# Altium PCB 驱动板PCB1.PcbDoc
Units mil, origin at the board's own origin, x right, y up, seen from the top; angles counter-clockwise.
Board outline 3130 x 1155 mil, 2 copper layers (Top Layer, Bottom Layer); 58 components, 42 nets, 176 pads, 160 vias.
Unrouted connection lines stored in the file: 134.
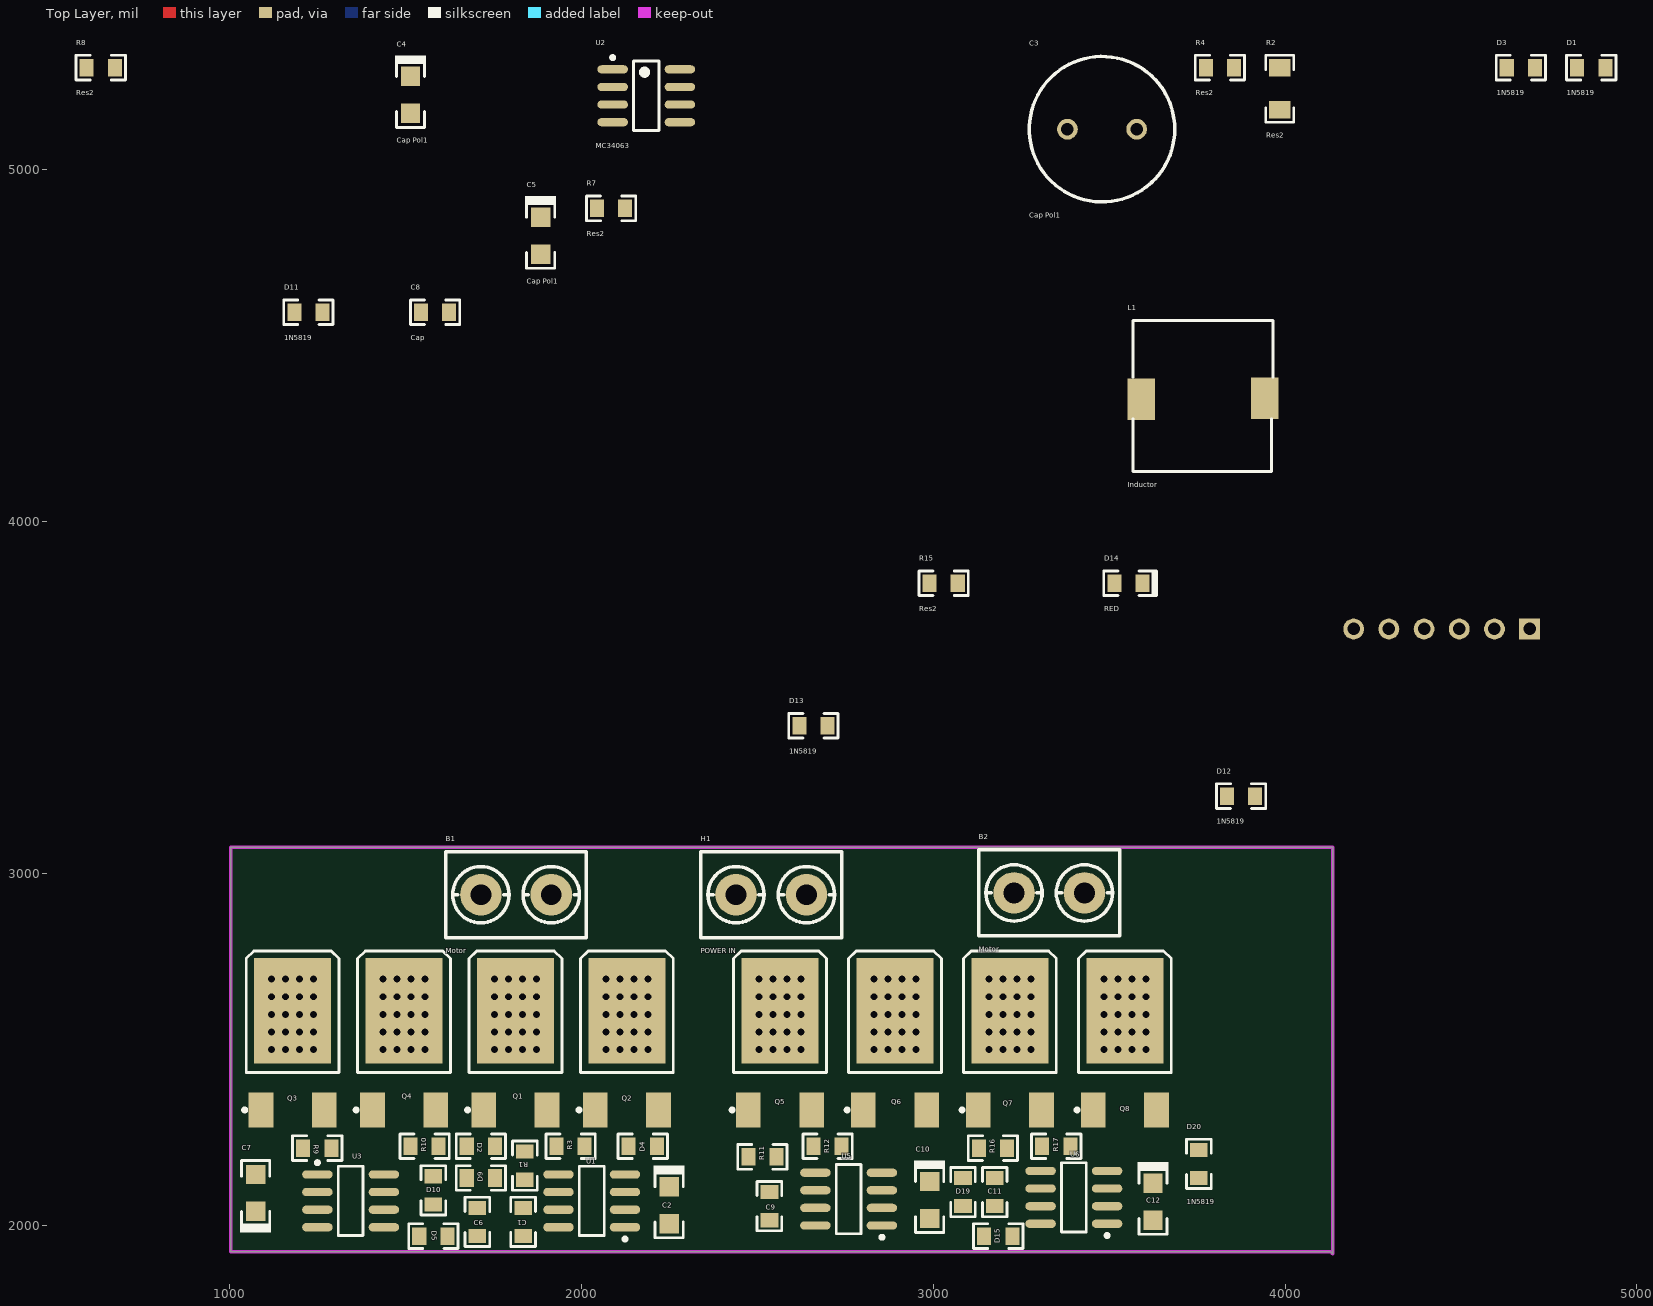
[diagram p0: Top Layer view]
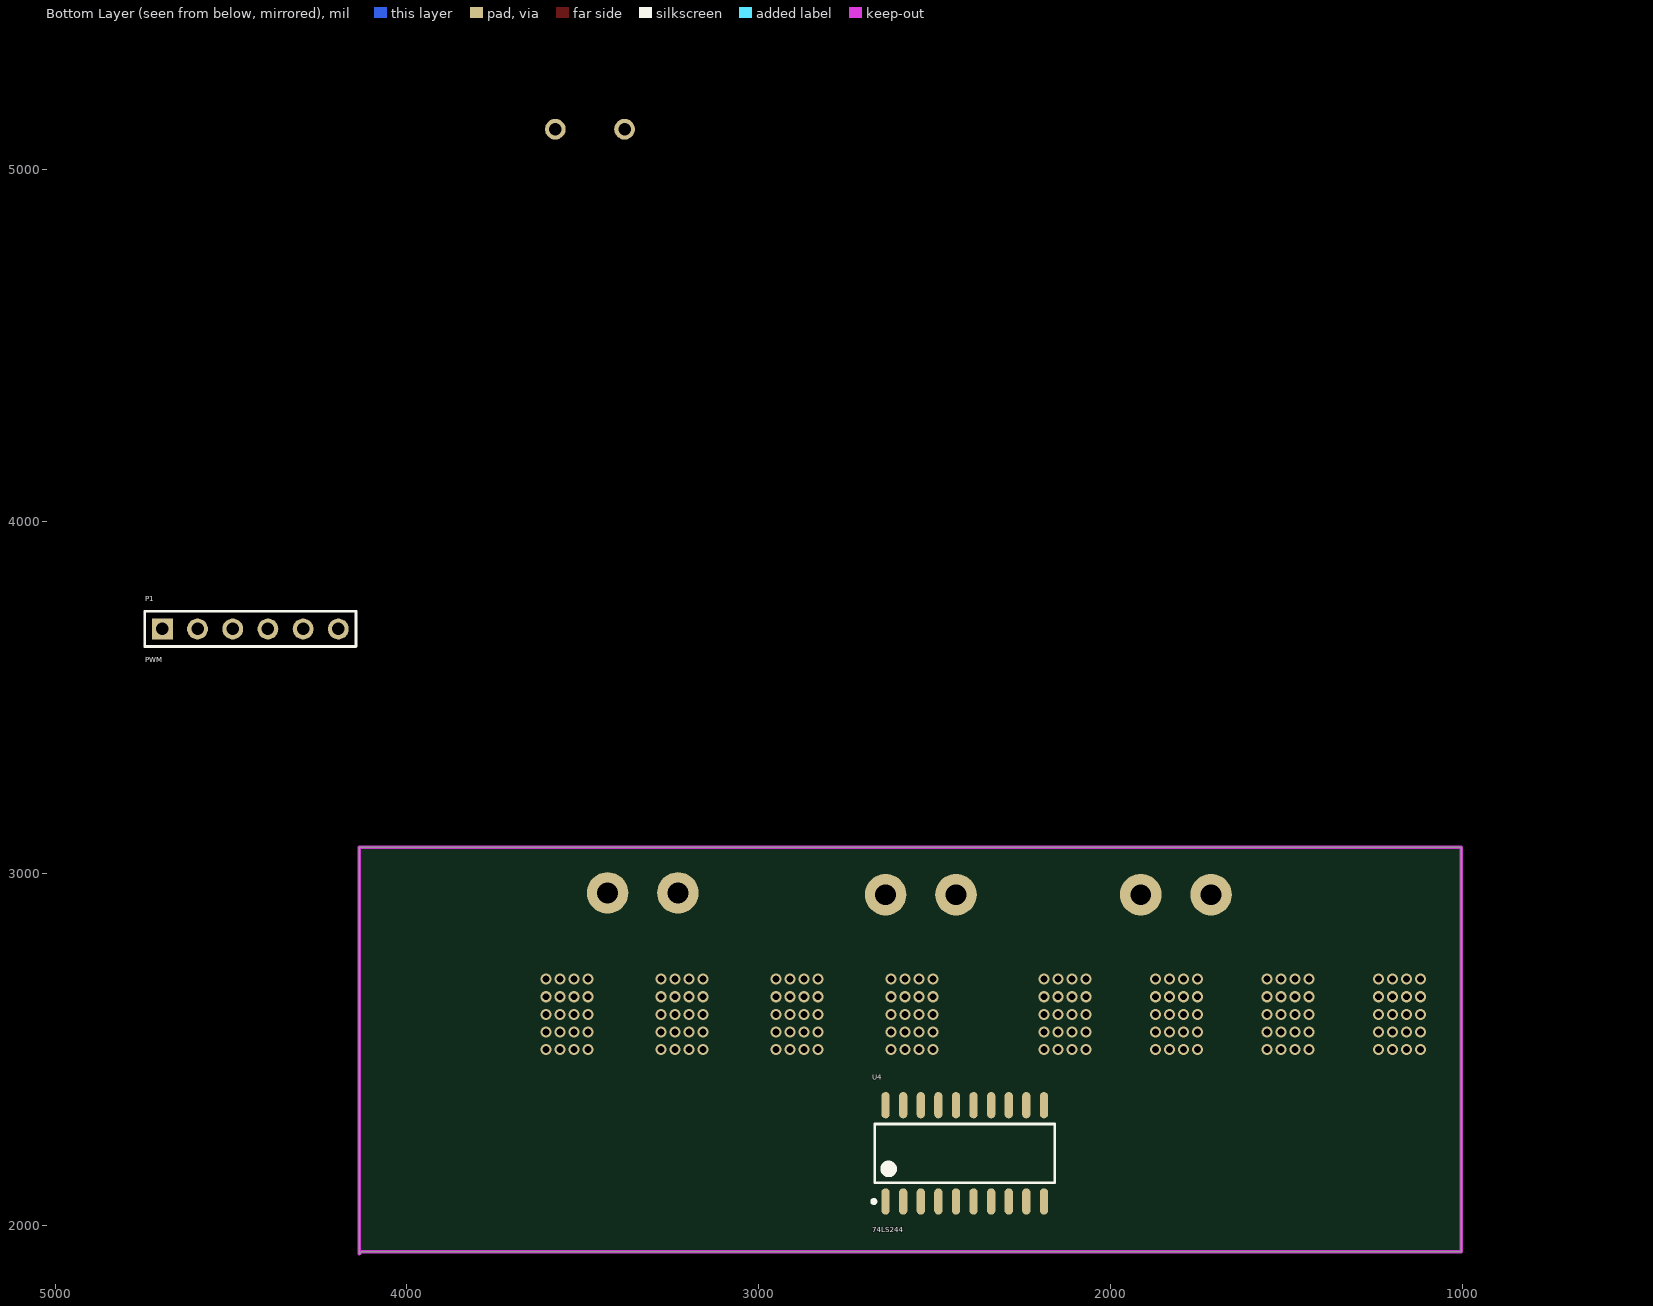
[diagram p1: Bottom Layer view, seen from below]

## Layer stack, top to bottom
Top Layer: signal copper 1.4
Dielectric: dielectric 12.6, FR-4, Dk 4.8
Bottom Layer: signal copper 1.4

## Board outline
1005,1925 4130,1925 4135,1920 4135,3075 1005,3075

## Design rules (kind name [scope] priority, off if disabled: settings)
Clearance [All] p1: gap=10
PolygonConnect [All] p1: connectstyle=Relief reliefconductorwidth=10 reliefentries=4 polygonreliefangle="90 Angle" airgapwidth=10
RoutingVias [All] p1: holewidth=28 width=50 viastyle="Through Hole" minholewidth=28 minwidth=50 maxholewidth=28 maxwidth=50
SolderMaskExpansion [All] p1: expansion=4
Width [All] p1: maxlimit=10 minlimit=10 preferedwidth=10
28 further rules are at their usual default settings.

## Components (designator, comment, footprint, x,y, rotation, side; value= is the part's Value field where it differs from the comment)
B1 "Motor" KF301-2P 1815,2940 r90 top
B2 "Motor" KF301-2P 3330,2945 r90 top
C1 "Cap" 0805(2012) 1835,2010 r90 top
C2 "Cap Pol1" SOD-323(0805) 2250,2060 r90 top
C3 "Cap Pol1" RB5-10.5 3480,5115 r0 top
C4 "Cap Pol1" SOD-323(0805) 1515,5215 r90 top
C5 "Cap Pol1" SOD-323(0805) 1885,4815 r90 top
C6 "Cap" 0805(2012) 1705,2010 r90 top
C7 "Cap Pol1" SOD-323(0805) 1075,2090 r270 top
C8 "Cap" 0805(2012) 1585,4595 r0 top
C9 "Cap" 0805(2012) 2535,2055 r90 top
C10 "Cap Pol1" SOD-323(0805) 2990,2075 r90 top
C11 "Cap" 0805(2012) 3175,2095 r90 top
C12 "Cap Pol1" SOD-323(0805) 3625,2070 r90 top
D1 "1N5819" 0805(2012) 4870,5290 r0 top
D2 "1N5819" 0805(2012) 1715,2225 r180 top
D3 "1N5819" 0805(2012) 4670,5290 r0 top
D4 "1N5819" 0805(2012) 2175,2225 r0 top
D5 "1N5819" 0805(2012) 1580,1970 r180 top
D9 "1N5819" 0805(2012) 1715,2135 r180 top
D10 "1N5819" 0805(2012) 1580,2100 r90 top
D11 "1N5819" 0805(2012) 1225,4595 r0 top
D12 "1N5819" 0805(2012) 3875,3220 r0 top
D13 "1N5819" 0805(2012) 2660,3420 r0 top
D14 "RED" 0805LED 3555,3825 r0 top
D15 "1N5819" 0805(2012) 3185,1970 r0 top
D19 "1N5819" 0805(2012) 3085,2095 r270 top
D20 "1N5819" 0805(2012) 3755,2175 r270 top
H1 "POWER IN" KF301-2P 2540,2940 r90 top
L1 "Inductor" 电感10*12 3765,4355 r0 top
P1 "PWM" HDR1X6 4695,3695 r180 bottom
Q1 "IR7843" LR7843 1813.33,2470 r270 top
Q2 "IR7843" LR7843 2130,2470 r270 top
Q3 "IR7843" LR7843 1180,2470 r270 top
Q4 "IR7843" LR7843 1496.67,2470 r270 top
Q5 "IR7843" LR7843 2565,2470 r270 top
Q6 "IR7843" LR7843 2891.67,2470 r270 top
Q7 "IR7843" LR7843 3218.33,2470 r270 top
Q8 "IR7843" LR7843 3545,2470 r270 top
R1 "Res2" 0805(2012) 1840,2170 r90 top
R2 "Res2" 1206(3216) 4055,5285 r90 top
R3 "Res2" 0805(2012) 1970,2225 r0 top
R4 "Res2" 0805(2012) 3815,5290 r0 top
R7 "Res2" 0805(2012) 2085,4890 r0 top
R8 "Res2" 0805(2012) 635,5290 r0 top
R9 "Res2" 0805(2012) 1250,2220 r180 top
R10 "Res2" 0805(2012) 1555,2225 r180 top
R11 "Res2" 0805(2012) 2515,2195 r180 top
R12 "Res2" 0805(2012) 2700,2225 r0 top
R15 "Res2" 0805(2012) 3030,3825 r0 top
R16 "Res2" 0805(2012) 3170,2220 r180 top
R17 "Res2" 0805(2012) 3350,2225 r0 top
U1 "IR2104S" IR2104S 2030,2070 r180 top
U2 "MC34063" MC34063 2185,5210 r0 top
U3 "IR2104S" IR2104S 1345,2070 r0 top
U4 "74LS244" 74ls244DA 2445,2125 r90 bottom
U5 "IR2104S" IR2104S 2760,2075 r180 top
U6 "IR2104S" IR2104S 3400,2080 r180 top

## Footprints (in the part's own frame and the unit in brackets; to place one, negate y for a bottom-side part, rotate by r counter-clockwise, add the part's x,y. Pads: shape width x height; smd on the part's side, far side on the other; paste and mask are expansions set on the pad)
74ls244DA [mm]
  oval 1.9x0.6 smd: 1(-1.443,4.953) 2(-1.443,3.683) 3(-1.443,2.413) 4(-1.443,1.143) 5(-1.443,-0.127) 6(-1.443,-1.397) 7(-1.443,-2.667) 8(-1.443,-3.937) 9(-1.443,-5.207) 10(-1.443,-6.477) 11(5.507,-6.477) 12(5.507,-5.207) 13(5.507,-3.937) 14(5.507,-2.667) 15(5.507,-1.397) 16(5.507,-0.127) 17(5.507,1.143) 18(5.507,2.413) 19(5.507,3.683) 20(5.507,4.953)
  silkscreen extent -1.57,-7.26 4.16,5.93, body extent -0.77,-7.26 4.83,5.74, height 2.2
0805(2012) [mil]
  rect 40x50 smd: 1(-40,0) 2(40,0)
  silkscreen extent -70,-35 70,35
0805LED [mil]
  rect 40x50 smd: 1(-40,0) 2(40,0)
  silkscreen extent -70,-35 80,35
1206(3216) [mil]
  rect 50x60 smd: 1(-115,70) 2(5,70)
  silkscreen extent -150,30 40,110
HDR1X6 [mm] "Connector; Header; 6 Position"
  rect 1.5x1.5 hole 0.9: 1(0,0)
  round 1.5 hole 0.9: 2(2.54,0) 3(5.08,0) 4(7.62,0) 5(10.16,0) 6(12.7,0)
  silkscreen extent -1.27,-1.27 13.97,1.27
IR2104S [mm]
  oval 2.2x0.6 smd: 1(-2.4,1.905) 2(-2.4,0.635) 3(-2.4,-0.635) 4(-2.4,-1.905) 5(2.4,-1.905) 6(2.4,-0.635) 7(2.4,0.635) 8(2.4,1.905)
  silkscreen extent -2.53,-2.5 0.9,2.88, body extent -2,-2.5 2,2.5, height 1.55
KF301-2P [mm]
  round 3 hole 1.5: 1(0,-2.54) 2(0,2.54)
  silkscreen extent -3.1,-5.08 3.1,5.08
LR7843 [mm]
  rect 2.54x1.778 smd: 1(3.6,-2.28) 3(3.6,2.28)
  rect 7.6x5.55 smd: 2(-3.556,0)
  silkscreen extent -7.87,-3.58 3.72,3.35
MC34063 [mm] "SOIC, 8-Leads, Body 4.90x3.90mm, Pitch 1.27mm, IPC Medium Density"
  oval 2.2x0.6 smd: 1(-2.425,1.905) 2(-2.425,0.635) 3(-2.425,-0.635) 4(-2.425,-1.905) 5(2.425,-1.905) 6(2.425,-0.635) 7(2.425,0.635) 8(2.425,1.905)
  silkscreen extent -2.55,-2.5 0.93,2.88, body extent -2,-2.5 2,2.5, height 1.5
RB5-10.5 [mm] "Capacitor (Radial); 2 Leads"
  round 1.5 hole 0.9: 1(-2.5,0) 2(2.5,0)
  silkscreen extent -5.25,-5.25 5.25,5.25
SOD-323(0805) [mil]
  rect 55x55 smd: 1(-55,0) 2(50,0)
  silkscreen extent -95,-44 110,44
电感10*12 [mm]
  rect 2x3 smd: 1(-4.4,-0.2) 2(4.5,-0.1)
  silkscreen extent -5,-5.4 5.1,5.5

## Part data
B1 B2: library part "Motor Servo", "Servo Motor"
C1 C6 C8 C9 C11: "Capacitor"
C2 C3 C4 C5 C7 C10 C12: "Polarized Capacitor (Radial)"
D1 D2 D3 D4 D5 D9 D10 D11 D12 D13 D15 D19 D20: library part 1N4148, "Silicon Epitaxial Planar Diode for Various Detector, Modulator, Demodulator"
D14: library part LED2, "Typical RED, GREEN, YELLOW, AMBER GaAs LED"
P1: library part "Header 6", "Header, 6-Pin"
Q1 Q2 Q3 Q4 Q5 Q6 Q7 Q8: "N-Channel Power MOSFET"
R1 R2 R3 R4 R7 R8 R9 R10 R11 R12 R15 R16 R17: "Resistor"

## Via types
v1: diameter 31.5, hole 19.68, Top Layer to Bottom Layer, 160 vias

## Nets (pads, with @x,y where several pads share a name; then routed paths per layer and width w, separated by ;. In a path a pad name is that pad's centre, name@x,y a point inside that pad or via, vN(x,y) a via of type N, cw(c..) or ccw(c..) an arc to the next point about the centre after c; other vN are vias at no path point)
5V: C8.2 P1.2 U4.20
12V: C2.1 C3.1 C7.1 C10.1 C12.1 D1.2 D3.1 D5.2 D11.2 D15.2 R7.1 U1.1 U1.3 U3.1 U3.3 U5.1 U5.3 U6.1 U6.3
GND: C2.2 C3.2 C4.2 C5.2 C7.2 C8.1 C10.2 C12.2 D4.2 D10.2 D13.2 D14.2 D20.2 H1.1 P1.1 Q2.3 Q4.3 Q6.3 Q8.3 R8.1 U1.4 U2.2 U2.4 U3.4 U4.1 U4.3 U4.5 U4.7 U4.9 U4.10 U4.11 U4.13 U4.15 U4.17 U4.19 U5.4 U6.4
"MOTOR IN1": U4.18 U5.2
"MOTOR IN2": U4.16 U6.2
"MOTOR IN3": U3.2 U4.14
"MOTOR IN4": U1.2 U4.12
NetB1_1: B1.1 C1.2 D2.2 D4.1 Q1.3 Q2.2 U1.6
  other v1: 2070,2500 2110,2500 2150,2500 2190,2500 2070,2550 2110,2550 2150,2550 2190,2550 2070,2600 2110,2600 2150,2600 2190,2600 2070,2650 2110,2650 2150,2650 2190,2650 2070,2700 2110,2700 2150,2700 2190,2700
NetB1_2: B1.2 C6.2 D9.2 D10.1 Q3.3 Q4.2 U3.6
  other v1: 1436.67,2500 1476.67,2500 1516.67,2500 1556.67,2500 1436.67,2550 1476.67,2550 1516.67,2550 1556.67,2550 1436.67,2600 1476.67,2600 1516.67,2600 1556.67,2600 1436.67,2650 1476.67,2650 1516.67,2650 1556.67,2650 1436.67,2700 1476.67,2700 1516.67,2700 1556.67,2700
NetB2_1: B2.1 C9.2 D12.2 D13.1 Q5.3 Q6.2 U5.6
  other v1: 2831.67,2500 2871.67,2500 2911.67,2500 2951.67,2500 2831.67,2550 2871.67,2550 2911.67,2550 2951.67,2550 2831.67,2600 2871.67,2600 2911.67,2600 2951.67,2600 2831.67,2650 2871.67,2650 2911.67,2650 2951.67,2650 2831.67,2700 2871.67,2700 2911.67,2700 2951.67,2700
NetB2_2: B2.2 C11.2 D19.2 D20.1 Q7.3 Q8.2 U6.6
  other v1: 3485,2500 3525,2500 3565,2500 3605,2500 3485,2550 3525,2550 3565,2550 3605,2550 3485,2600 3525,2600 3565,2600 3605,2600 3485,2650 3525,2650 3565,2650 3605,2650 3485,2700 3525,2700 3565,2700 3605,2700
NetC1_1: C1.1 D1.1 U1.8
NetC4_1: C4.1 U2.3
NetC6_1: C6.1 D5.1 U3.8
NetC9_1: C9.1 D11.1 U5.8
NetC11_1: C11.1 D15.1 U6.8
NetD3_2: D3.2 L1.2 U2.1
NetD14_1: D14.1 R15.2
NetL1_1: L1.1 R2.1 R4.2 U2.7
NetP1_3: P1.3 U4.8
NetP1_4: P1.4 U4.6
NetP1_5: P1.5 U4.4
NetP1_6: P1.6 U4.2
NetQ1_1: Q1.1 R1.2
NetQ2_1: Q2.1 R3.2
NetQ3_1: Q3.1 R9.2
NetQ4_1: Q4.1 R10.2
NetQ5_1: Q5.1 R11.2
NetQ6_1: Q6.1 R12.2
NetQ7_1: Q7.1 R16.2
NetQ8_1: Q8.1 R17.2
NetR1_1: R1.1 U1.7
NetR3_1: R3.1 U1.5
NetR4_1: R4.1 U2.8
NetR7_2: R7.2 R8.2 U2.5
NetR9_1: R9.1 U3.7
NetR10_1: R10.1 U3.5
NetR11_1: R11.1 U5.7
NetR12_1: R12.1 U5.5
NetR16_1: R16.1 U6.7
NetR17_1: R17.1 U6.5
VBAT: C5.1 D2.1 D9.1 D12.1 D19.1 H1.2 Q1.2 Q3.2 Q5.2 Q7.2 R2.2 R15.1 U2.6
  other v1: 1120,2500 1160,2500 1200,2500 1240,2500 1753.33,2500 1793.33,2500 1833.33,2500 1873.33,2500 2505,2500 2545,2500 2585,2500 2625,2500 3158.33,2500 3198.33,2500 3238.33,2500 3278.33,2500 1120,2550 1160,2550 1200,2550 1240,2550 1753.33,2550 1793.33,2550 1833.33,2550 1873.33,2550 2505,2550 2545,2550 2585,2550 2625,2550 3158.33,2550 3198.33,2550 3238.33,2550 3278.33,2550 1120,2600 1160,2600 1200,2600 1240,2600 1753.33,2600 1793.33,2600 1833.33,2600 1873.33,2600 2505,2600 2545,2600 2585,2600 2625,2600 3158.33,2600 3198.33,2600 3238.33,2600 3278.33,2600 1120,2650 1160,2650 1200,2650 1240,2650 1753.33,2650 1793.33,2650 1833.33,2650 1873.33,2650 2505,2650 2545,2650 2585,2650 2625,2650 3158.33,2650 3198.33,2650 3238.33,2650 3278.33,2650 1120,2700 1160,2700 1200,2700 1240,2700 1753.33,2700 1793.33,2700 1833.33,2700 1873.33,2700 2505,2700 2545,2700 2585,2700 2625,2700 3158.33,2700 3198.33,2700 3238.33,2700 3278.33,2700

## Keep-outs
Keep-Out Layer:
  lines w10: 1005,1925 1005,3075 2495,3075 4135,3075 4135,1920 4130,1925 2495,1925 1005,1925